# Altium PCB Keyboard.PcbDoc
Units mm, origin at the board's own origin, x right, y up, seen from the top; angles counter-clockwise.
Board outline 290.13 x 100.27 mm, 2 copper layers (Top Layer, Bottom Layer); 133 components, 91 nets, 521 pads, 31 vias.
Unrouted connection lines stored in the file: 15.
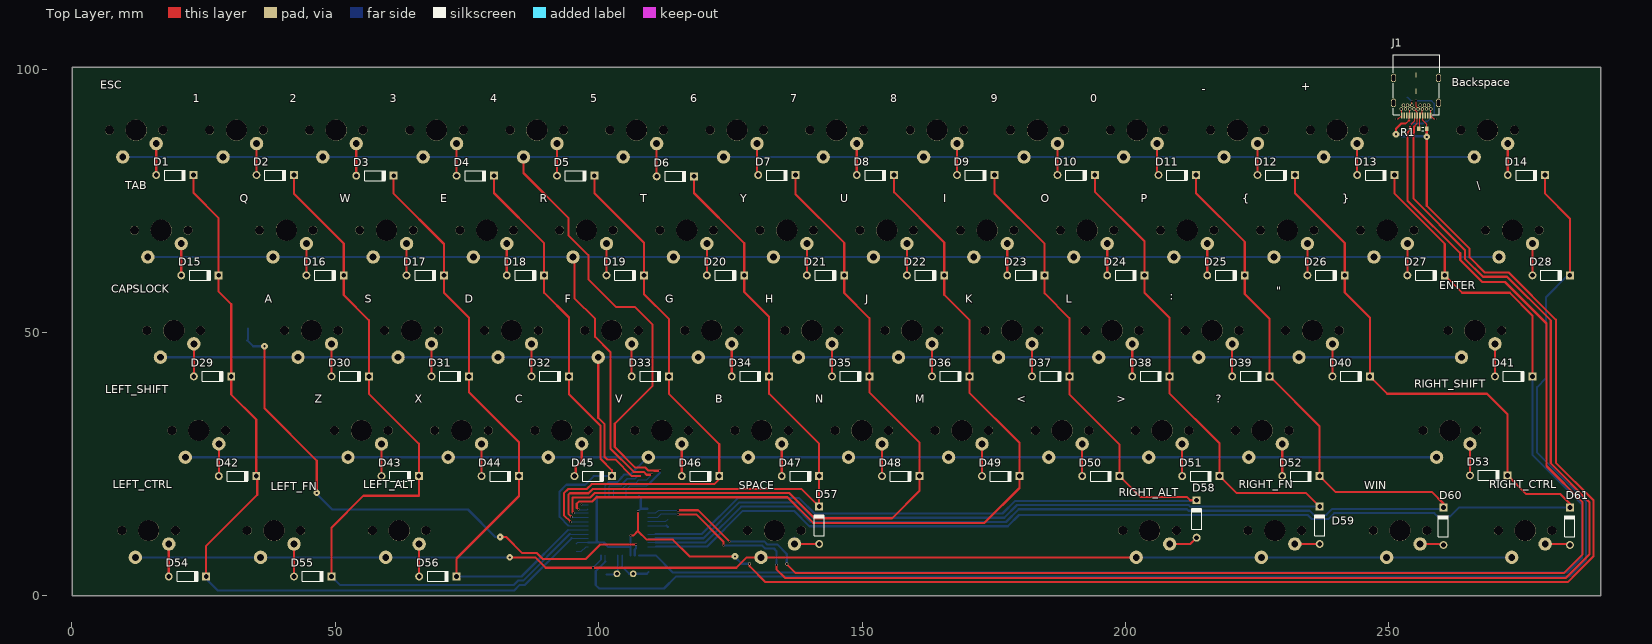
[diagram p0: Top Layer view]
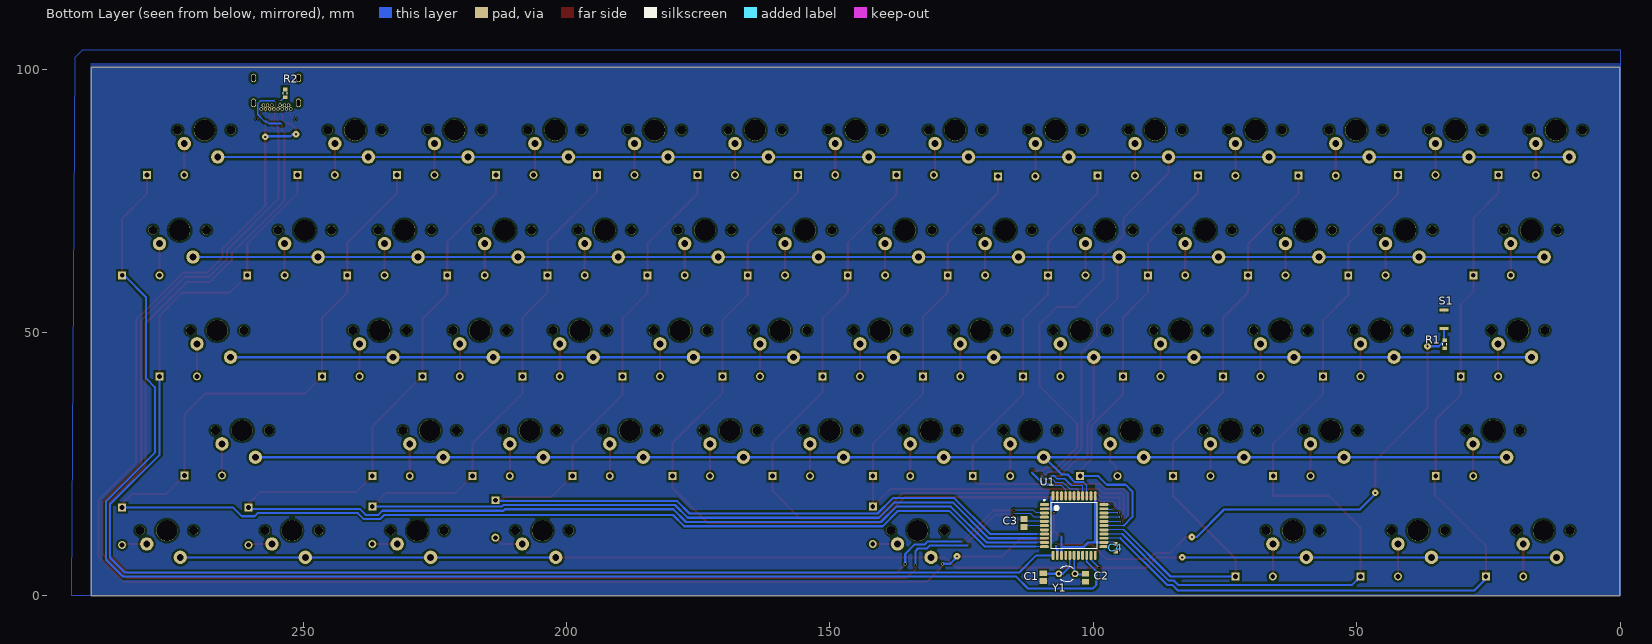
[diagram p1: Bottom Layer view, seen from below]

## Layer stack, top to bottom
Top Solder: solder mask 0.0102, Solder Resist, Dk 3.5
Top Layer: signal copper 0.0356
Dielectric 1: dielectric 0.32, FR-4, Dk 4.8
Bottom Layer: signal copper 0.0356
Bottom Solder: solder mask 0.0102, Solder Resist, Dk 3.5

## Board outline
0.063,0.064 290.195,0.064 290.195,100.33 0.063,100.33

## Design rules (kind name [scope] priority, off if disabled: settings)
Clearance [All] p1: gap=0.4 ignorepadtopadclearanceinfootprint=TRUE except(0: Arc-Hole Track-Hole SMDPad-Hole THPad-Hole Via-Hole Fill-Hole Poly-Hole Region-Hole Text-Hole; 0.1: Arc-SMDPad Arc-THPad Track-SMDPad Track-THPad SMDPad-SMDPad SMDPad-THPad THPad-THPad)
PolygonConnect [All] p1: connectstyle=Relief reliefconductorwidth=0.254 reliefentries=4 polygonreliefangle="90 Angle" airgapwidth=0.254
RoomDefinition Keyboard [InComponentClass('Keyboard')] p1: confinementstyle=ConfineIn formatcopy=TRUE lockcomponents=FALSE outline 0,0 50.8,0 50.8,25.4 0,25.4
RoutingVias [All] p1: holewidth=0.711 width=1.27 viastyle="Through Hole" minholewidth=0.711 minwidth=1.27 maxholewidth=0.711 maxwidth=1.27
SMDNeckDown [All] p1: percent=50.000
SolderMaskExpansion [All] p1: expansion=0.102
Width [All] p1: maxlimit=0.4 minlimit=0.1 preferedwidth=0.4 minimp=50.000000 maximp=50.000000 favimp=50.000000
30 further rules are at their usual default settings.

## Components (designator, comment, footprint, x,y, rotation, side; value= is the part's Value field where it differs from the comment)
0 "KEYSWITCH-PLAIN-MX-1U" MX-1U 202.184,88.392 r180 top
1 "KEYSWITCH-PLAIN-MX-1U" MX-1U 31.242,88.392 r180 top
2 "KEYSWITCH-PLAIN-MX-1U" MX-1U 50.165,88.392 r180 top
3 "KEYSWITCH-PLAIN-MX-1U" MX-1U 69.215,88.392 r180 top
4 "KEYSWITCH-PLAIN-MX-1U" MX-1U 88.265,88.392 r180 top
5 "KEYSWITCH-PLAIN-MX-1U" MX-1U 107.188,88.392 r180 top
6 "KEYSWITCH-PLAIN-MX-1U" MX-1U 126.238,88.392 r180 top
7 "KEYSWITCH-PLAIN-MX-1U" MX-1U 145.161,88.392 r180 top
8 "KEYSWITCH-PLAIN-MX-1U" MX-1U 164.211,88.392 r180 top
9 "KEYSWITCH-PLAIN-MX-1U" MX-1U 183.261,88.392 r180 top
"\"" "KEYSWITCH-PLAIN-MX-1U" MX-1U 235.458,50.379 r180 top
+ "KEYSWITCH-PLAIN-MX-1U" MX-1U 240.157,88.392 r180 top
- "KEYSWITCH-PLAIN-MX-1U" MX-1U 221.234,88.392 r180 top
: "KEYSWITCH-PLAIN-MX-1U" MX-1U 216.435,50.379 r180 top
< "KEYSWITCH-PLAIN-MX-1U" MX-1U 187.96,31.389 r180 top
> "KEYSWITCH-PLAIN-MX-1U" MX-1U 206.94,31.389 r180 top
? "KEYSWITCH-PLAIN-MX-1U" MX-1U 225.933,31.389 r180 top
\ "KEYSWITCH-PLAIN-MX-1U" MX-1U 273.431,69.402 r180 top
A "KEYSWITCH-PLAIN-MX-1U" MX-1U 45.466,50.379 r180 top
B "KEYSWITCH-PLAIN-MX-1U" MX-1U 130.937,31.389 r180 top
Backspace "KEYSWITCH-PLAIN-MX-1U" MX-1U 268.732,88.392 r180 top
C "KEYSWITCH-PLAIN-MX-1U" MX-1U 92.97,31.389 r180 top
C1 "Cap Pol3" C0805 109.474,3.556 r270 bottom value=22pF
C2 "Cap Pol3" C0805 101.473,3.429 r270 bottom value=22pF
C3 "Cap Pol3" C0805 113.157,13.831 r90 bottom value=1uF
C4 "Cap" 1608[0603] 95.758,9.144 r90 bottom value=100nF
CAPSLOCK "KEYSWITCH-PLAIN-MX-1U" MX-1U 19.344,50.379 r180 top
D "KEYSWITCH-PLAIN-MX-1U" MX-1U 83.439,50.379 r180 top
D1 "Diode 1N4148" DO-35 19.552,79.883 r0 top
D2 "Diode 1N4148" DO-35 38.602,79.883 r0 top
D3 "Diode 1N4148" DO-35 57.525,79.756 r0 top
D4 "Diode 1N4148" DO-35 76.575,79.756 r0 top
D5 "Diode 1N4148" DO-35 95.625,79.756 r0 top
D6 "Diode 1N4148" DO-35 114.548,79.629 r0 top
D7 "Diode 1N4148" DO-35 133.813,79.883 r0 top
D8 "Diode 1N4148" DO-35 152.521,79.883 r0 top
D9 "Diode 1N4148" DO-35 171.571,79.883 r0 top
D10 "Diode 1N4148" DO-35 190.621,79.883 r0 top
D11 "Diode 1N4148" DO-35 209.804,79.883 r0 top
D12 "Diode 1N4148" DO-35 228.594,79.883 r0 top
D13 "Diode 1N4148" DO-35 247.517,79.883 r0 top
D14 "Diode 1N4148" DO-35 276.092,79.883 r0 top
D15 "Diode 1N4148" DO-35 24.311,60.833 r0 top
D16 "Diode 1N4148" DO-35 48.06,60.833 r0 top
D17 "Diode 1N4148" DO-35 67.077,60.833 r0 top
D18 "Diode 1N4148" DO-35 86.1,60.833 r0 top
D19 "Diode 1N4148" DO-35 105.023,60.833 r0 top
D20 "Diode 1N4148" DO-35 124.073,60.833 r0 top
D21 "Diode 1N4148" DO-35 143.06,60.833 r0 top
D22 "Diode 1N4148" DO-35 162.046,60.833 r0 top
D23 "Diode 1N4148" DO-35 181.096,60.833 r0 top
D24 "Diode 1N4148" DO-35 200.069,60.833 r0 top
D25 "Diode 1N4148" DO-35 219.069,60.833 r0 top
D26 "Diode 1N4148" DO-35 238.069,60.833 r0 top
D27 "Diode 1N4148" DO-35 257.042,60.833 r0 top
D28 "Diode 1N4148" DO-35 280.791,60.833 r0 top
D29 "Diode 1N4148" DO-35 26.704,41.656 r0 top
D30 "Diode 1N4148" DO-35 52.826,41.656 r0 top
D31 "Diode 1N4148" DO-35 71.816,41.656 r0 top
D32 "Diode 1N4148" DO-35 90.799,41.656 r0 top
D33 "Diode 1N4148" DO-35 109.809,41.656 r0 top
D34 "Diode 1N4148" DO-35 128.799,41.656 r0 top
D35 "Diode 1N4148" DO-35 147.822,41.656 r0 top
D36 "Diode 1N4148" DO-35 166.812,41.656 r0 top
D37 "Diode 1N4148" DO-35 185.795,41.656 r0 top
D38 "Diode 1N4148" DO-35 204.815,41.656 r0 top
D39 "Diode 1N4148" DO-35 223.795,41.656 r0 top
D40 "Diode 1N4148" DO-35 242.818,41.656 r0 top
D41 "Diode 1N4148" DO-35 273.679,41.656 r0 top
D42 "Diode 1N4148" DO-35 31.44,22.733 r0 top
D43 "Diode 1N4148" DO-35 62.311,22.733 r0 top
D44 "Diode 1N4148" DO-35 81.314,22.733 r0 top
D45 "Diode 1N4148" DO-35 98.939,22.733 r0 top
D46 "Diode 1N4148" DO-35 119.32,22.733 r0 top
D47 "Diode 1N4148" DO-35 138.297,22.733 r0 top
D48 "Diode 1N4148" DO-35 157.317,22.733 r0 top
D49 "Diode 1N4148" DO-35 176.31,22.733 r0 top
D50 "Diode 1N4148" DO-35 195.32,22.733 r0 top
D51 "Diode 1N4148" DO-35 214.3,22.733 r0 top
D52 "Diode 1N4148" DO-35 233.293,22.733 r0 top
D53 "Diode 1N4148" DO-35 268.94,22.86 r0 top
D54 "Diode 1N4148" DO-35 21.94,3.683 r0 top
D55 "Diode 1N4148" DO-35 45.714,3.683 r0 top
D56 "Diode 1N4148" DO-35 69.463,3.683 r0 top
D57 "Diode 1N4148" DO-35 141.847,13.396 r90 top
D58 "Diode 1N4148" DO-35 213.487,14.599 r90 top
D59 "Diode 1N4148" DO-35 236.843,13.396 r90 top
D60 "Diode 1N4148" DO-35 260.35,13.208 r90 top
D61 "Diode 1N4148" DO-35 284.353,13.208 r90 top
E "KEYSWITCH-PLAIN-MX-1U" MX-1U 78.74,69.402 r180 top
ENTER "KEYSWITCH-PLAIN-MX-1U" MX-1U 266.319,50.379 r180 top
ESC "KEYSWITCH-PLAIN-MX-1U" MX-1U 12.192,88.392 r180 top
F "KEYSWITCH-PLAIN-MX-1U" MX-1U 102.449,50.379 r180 top
G "KEYSWITCH-PLAIN-MX-1U" MX-1U 121.439,50.379 r180 top
H "KEYSWITCH-PLAIN-MX-1U" MX-1U 140.462,50.379 r180 top
I "KEYSWITCH-PLAIN-MX-1U" MX-1U 173.736,69.402 r180 top
J "KEYSWITCH-PLAIN-MX-1U" MX-1U 159.452,50.379 r180 top
J1 "USB 3.1 Type C" 632723100011 255.143,96.813 r180 top
K "KEYSWITCH-PLAIN-MX-1U" MX-1U 178.435,50.379 r180 top
L "KEYSWITCH-PLAIN-MX-1U" MX-1U 197.455,50.379 r180 top
LEFT_ALT "KEYSWITCH-PLAIN-MX-1U" MX-1U 62.103,12.386 r180 top
LEFT_CTRL "KEYSWITCH-PLAIN-MX-1U" MX-1U 14.58,12.386 r180 top
LEFT_FN "KEYSWITCH-PLAIN-MX-1U" MX-1U 38.354,12.386 r180 top
LEFT_SHIFT "KEYSWITCH-PLAIN-MX-1U" MX-1U 24.08,31.389 r180 top
M "KEYSWITCH-PLAIN-MX-1U" MX-1U 168.95,31.389 r180 top
N "KEYSWITCH-PLAIN-MX-1U" MX-1U 149.957,31.389 r180 top
O "KEYSWITCH-PLAIN-MX-1U" MX-1U 192.709,69.402 r180 top
P "KEYSWITCH-PLAIN-MX-1U" MX-1U 211.709,69.402 r180 top
Q "KEYSWITCH-PLAIN-MX-1U" MX-1U 40.7,69.402 r180 top
R "KEYSWITCH-PLAIN-MX-1U" MX-1U 97.663,69.402 r180 top
R1 "Res3" J1-0603 256.425,88.646 r180 top value=5K1
R1 "Res3" J1-0603 33.274,47.752 r270 bottom value=10K
R2 "Res3" J1-0603 253.365,95.377 r90 bottom value=5K1
RIGHT_ALT "KEYSWITCH-PLAIN-MX-1U" MX-1U 204.57,12.386 r180 top
RIGHT_CTRL "KEYSWITCH-PLAIN-MX-1U" MX-1U 275.844,12.386 r180 top
RIGHT_FN "KEYSWITCH-PLAIN-MX-1U" MX-1U 228.319,12.386 r180 top
RIGHT_SHIFT "KEYSWITCH-PLAIN-MX-1U" MX-1U 261.58,31.389 r180 top
S "KEYSWITCH-PLAIN-MX-1U" MX-1U 64.456,50.379 r180 top
S1 "SPST.B3U-1000P(M)" B3U-1000P(M) 33.401,52.479 r90 bottom
SPACE "KEYSWITCH-PLAIN-MX-1U" MX-1U 133.34,12.386 r180 top
T "KEYSWITCH-PLAIN-MX-1U" MX-1U 116.713,69.402 r180 top
TAB "KEYSWITCH-PLAIN-MX-1U" MX-1U 16.951,69.402 r180 top
U "KEYSWITCH-PLAIN-MX-1U" MX-1U 154.686,69.402 r180 top
U1 "ATmega32U4-AU" 44ML_N 103.632,13.335 r180 bottom
V "KEYSWITCH-PLAIN-MX-1U" MX-1U 111.96,31.389 r180 top
W "KEYSWITCH-PLAIN-MX-1U" MX-1U 59.717,69.402 r180 top
WIN "KEYSWITCH-PLAIN-MX-1U" MX-1U 252.1,12.386 r180 top
X "KEYSWITCH-PLAIN-MX-1U" MX-1U 73.954,31.389 r180 top
Y "KEYSWITCH-PLAIN-MX-1U" MX-1U 135.7,69.402 r180 top
Y1 "XTAL" R38 105.003,4.191 r270 bottom
Z "KEYSWITCH-PLAIN-MX-1U" MX-1U 54.951,31.389 r180 top
{ "KEYSWITCH-PLAIN-MX-1U" MX-1U 230.709,69.402 r180 top
} "KEYSWITCH-PLAIN-MX-1U" MX-1U 249.682,69.402 r180 top

## Footprints (in the part's own frame and the unit in brackets; to place one, negate y for a bottom-side part, rotate by r counter-clockwise, add the part's x,y. Pads: shape width x height; smd on the part's side, far side on the other; paste and mask are expansions set on the pad)
44ML_N [mm] "Thin QFP, 44-Leads, Body 10x10mm, Pitch 0.8mm, IPC Medium Density"
  oval 1.75x0.55 smd: 1(-5.65,4) 2(-5.65,3.2) 3(-5.65,2.4) 4(-5.65,1.6) 5(-5.65,0.8) 6(-5.65,0) 7(-5.65,-0.8) 8(-5.65,-1.6) 9(-5.65,-2.4) 10(-5.65,-3.2) 11(-5.65,-4) 23(5.65,-4) 24(5.65,-3.2) 25(5.65,-2.4) 26(5.65,-1.6) 27(5.65,-0.8) 28(5.65,0) 29(5.65,0.8) 30(5.65,1.6) 31(5.65,2.4) 32(5.65,3.2) 33(5.65,4)
  oval 0.55x1.75 smd: 12(-4,-5.65) 13(-3.2,-5.65) 14(-2.4,-5.65) 15(-1.6,-5.65) 16(-0.8,-5.65) 17(0,-5.65) 18(0.8,-5.65) 19(1.6,-5.65) 20(2.4,-5.65) 21(3.2,-5.65) 22(4,-5.65) 34(4,5.65) 35(3.2,5.65) 36(2.4,5.65) 37(1.6,5.65) 38(0.8,5.65) 39(0,5.65) 40(-0.8,5.65) 41(-1.6,5.65) 42(-2.4,5.65) 43(-3.2,5.65) 44(-4,5.65)
  silkscreen extent -5.77,-4.35 4.35,4.95, body extent -5,-5 5,5, height 1.2
1608[0603] [mm] "Chip Capacitor, Body 1.6x0.8mm, IPC High Density"
  rect 0.8x0.9 smd: 1(-0.7,0) 2(0.7,0)
  body extent -0.87,-0.48 0.87,0.48, height 1.3
632723100011 [mm] "USB 3.1 Type C Receptacle Horizontal THR"
  rect 0.3x1.2 smd: A1(-2.75,5.635) A2(-2.25,5.635) A3(-1.75,5.635) A4(-1.25,5.635) A5(-0.75,5.635) A6(-0.25,5.635) A7(0.25,5.635) A8(0.75,5.635) A9(1.25,5.635) A10(1.75,5.635) A11(2.25,5.635) A12(2.75,5.635)
  round 0.65 hole 0.4: B1(2.8,4.385) B2(2.4,3.685) B3(1.6,3.685) B4(1.2,4.385) B5(0.8,3.685) B6(0.4,4.385) B7(-0.4,4.385) B8(-0.8,3.685) B9(-1.2,4.385) B10(-1.6,3.685) B11(-2.4,3.685) B12(-2.8,4.385) G1(2,4.385) G2(-2,4.385)
  oval 1x1.6 hole 0.6 slot 1.2 at 90 deg: S1(-4.27,3.235) S2(4.27,3.235) S3(-4.27,-1.495) S4(4.27,-1.495)
  rect 0.2x1 smd: ""(0,1.055) ""(0,-2.045)
  silkscreen extent -4.37,-5.89 4.37,5.47, body extent -4.37,-5.89 4.37,5.9, height 3.05
B3U-1000P(M) [mm]
  rect 0.6x1.7 smd mask+0: 1(-1.75,0) 2(1.75,0)
C0805 [mm] "Chip Capacitor, Body 2.0x1.3mm, IPC High Density"
  rect 1.1x1.4 smd: 1(-0.75,0) 2(0.75,0)
  body extent -1.1,-0.72 1.1,0.72, height 1.4
DO-35 [mm] "Diode, Axial; Body 3.8 x 1.9 mm (LxDia. max), Lead Dia. 0.53 mm (max)"
  round 1.5 hole 0.9: 1(-3.55,0)
  rect 1.5x1.5 hole 0.9: 2(3.55,0)
  silkscreen extent -1.95,-0.95 2.05,0.95
J1-0603 [mm] "Chip Resistor, Body 1.6x0.8mm, IPC High Density"
  rect 0.7x0.9 smd: 1(-0.75,0) 2(0.75,0)
  silkscreen extent -0.2,-0.35 0.2,0.35, body extent -0.85,-0.48 0.85,0.48, height 0.9
MX-1U [mm]
  round 1.7 hole 1.7 unplated: 1(-5.08,0) 1(5.08,0)
  round 4 hole 4 unplated: 1(0,0)
  round 2.54 / inner round 1.524 / far side round 2.54 hole 1.3: MX1(-3.81,2.54) MX2(2.54,5.08)
R38 [mm] "Crystal, Thru-Hole; 2 Leads; Body 3.1 x 8.2 mm (Dia.xH)"
  round 1.3 hole 0.7: 1(0,1.55) 2(0,-1.55)
  silkscreen extent -1.55,-1.19 1.55,1.17

## Part data
0 1 2 3 4 5 6 7 8 9 "\"" + - : < > ? \ A B Backspace C CAPSLOCK D E ENTER ESC F G H I J K L LEFT_ALT LEFT_CTRL LEFT_FN LEFT_SHIFT M N O P Q R RIGHT_ALT RIGHT_CTRL RIGHT_FN RIGHT_SHIFT S SPACE T TAB U V W WIN X Y Z { }: Package=MX-1U, DeviceName=-MX-1U, DeviceSetName=KEYSWITCH-PLAIN, GateName_1=G$1, LibraryName=Keyboard, SymbolName_1=KEYSWITCH-PLAIN
C1 C2 C3: "Polarized Capacitor (Surface Mount)", LatestRevisionDate=29-May-2009, LatestRevisionNote="IPC-7351 Footprint Added.", PackageDescription="Chip Capacitor", PackageReference=C0805, Published=8-Jun-2000, Publisher="Altium Limited"
C4: "Capacitor", LatestRevisionDate=17-Jul-2002, LatestRevisionNote="Re-released for DXP Platform.", PackageDescription="Radial Cap, Thru-Hole; 2 Leads; 0.3 in Pin Spacing", PackageReference=RAD-0.3, Published=8-Jun-2000, Publisher="Altium Limited"
D1 D2 D3 D4 D5 D6 D7 D8 D9 D10 D11 D12 D13 D14 D15 D16 D17 D18 D19 D20 D21 D22 D23 D24 D25 D26 D27 D28 D29 D30 D31 D32 D33 D34 D35 D36 D37 D38 D39 D40 D41 D42 D43 D44 D45 D46 D47 D48 D49 D50 D51 D52 D53 D54 D55 D56 D57 D58 D59 D60 D61: "High Conductance Fast Diode", Code_JEDEC=DO-204-AH, ComponentLink1Description="Manufacturer Link", ComponentLink1URL=http://www.fairchildsemi.com/, ComponentLink2Description=Datasheet, ComponentLink2URL=http://www.fairchildsemi.com/ds/1N%2F1N4148.pdf, DatasheetVersion=1997, LatestRevisionDate=17-Jul-2002, LatestRevisionNote="Re-released for DXP Platform.", PackageDescription="Diode, Axial; Body 3.8 x 1.9 mm (LxDia. max), Lead Dia. 0.53 mm (max)", PackageReference=DO-35, Published=8-Jun-2000, Publisher="Altium Limited"
J1: library part 632723100011, "USB 3.1 Type C Receptacle Horizontal THR WR-COM", Operating Temperature="-25 to 105 degC", Rated Current="5 A", ComponentLink1Description=Manufacturer, ComponentLink1URL=http://www.we-online.de, ComponentLink2Description=Datasheet, ComponentLink2URL=http://katalog.we-online.de/em/datasheet/632723x00011.pdf, Gender="Female Plug", Interface Type="USB 3.1 Type C", Mounting Technology=THR, Orientation=Horizontal, Packaging="Tape and Reel with Cap", Part Number=632723100011, Published Date="May 2018", Publisher="Wurth Elektronik"
R1 R1 R2: "Resistor", LatestRevisionDate=29-May-2009, LatestRevisionNote="IPC-7351 Footprint Added.", PackageDescription="Chip Resistor", PackageReference=J1-0603, Published=8-Jun-2000, Publisher="Altium Limited"
S1: Package=B3U-1000P(M), DeviceName=.B3U-1000P(M), DeviceSetName=SPST, GateName_1=G$1, LibraryName=omran_switches, SymbolName_1=SPST
U1: "8-bit AVR Microcontroller, 2.7-5.5V, 16MHz, 32KB Flash, 1KB EEPROM, 2.5KB SRAM, USB Controller, 44-pin TQFP, Industrial Grade (-40°C to 85°C), Ext Osc", ComponentLink1Description="Manufacturer URL", ComponentLink1URL=http://www.atmel.com/, ComponentLink2Description="ATmega16U4/32U4 Datasheet", ComponentLink2URL=http://www.atmel.com/dyn/resources/prod_documents/doc7766.pdf, ComponentLink3Description="ATmega16U4 ATmega32U4 Summary", ComponentLink3URL=http://www.atmel.com/dyn/resources/prod_documents/7766S.pdf, DatasheetVersion="revF, Nov-2010", PackageDescription="44-Pin Plastic Thin Quad Flat Pack, 10 x 10 x 1.0 mm Body, 0.8 mm Pitch (TQFP)", PackageReference=44ML, PackageVersion="rev.G, Jul-2007"
Y1: "Crystal Oscillator", LatestRevisionDate=17-Jul-2002, LatestRevisionNote="Re-released for DXP Platform.", PackageDescription="Crystal, Thru-Hole; 2 Leads; Body 3.1 x 8.2 mm (Dia.xH)", PackageReference=R38, Published=8-Jun-2000, Publisher="Altium Limited"

## Via types
v1: diameter 0.4, hole 0.4, Top Layer to Bottom Layer, 22 vias
v2: diameter 1.27, hole 0.4, Top Layer to Bottom Layer, 7 vias
v3: diameter 0.6, hole 0.4, Top Layer to Bottom Layer, 2 vias

## Nets (pads, with @x,y where several pads share a name; then routed paths per layer and width w, separated by ;. In a path a pad name is that pad's centre, name@x,y a point inside that pad or via, vN(x,y) a via of type N, cw(c..) or ccw(c..) an arc to the next point about the centre after c; other vN are vias at no path point)
+5: C4.2 J1.A4 J1.A9 J1.B4 J1.B9 R1.1@257.175,88.646 R1.2@33.274,47.002 R2.2 U1.2 U1.7 U1.14 U1.24 U1.34 U1.44 | length 334.9
  Top Layer w0.1: 253.893,90.19 J1.A9 253.918,91.178 253.918,92.403 J1.B4 ; J1.B9@256.368,92.403 J1.B9 256.343,91.435 256.393,91.385 J1.A4 256.393,90.317 257.175,89.535 257.175,88.912 R1.1@257.042,88.779
  Top Layer w0.3: 252.857,89.662 253.193,89.662 253.689,90.158 253.861,90.158 253.893,90.19
  Top Layer w0.4: v1(106.045,11.43) 106.553,11.43 107.442,12.319 ; v1(107.442,16.002) 107.442,12.319 ; v2(125.857,7.493) 117.221,7.493 114.046,10.668 109.093,10.668 107.442,12.319 ; v3(128.651,6.096) 128.651,5.588 131.645,2.594 283.924,2.594 285.572,4.242 288.836,7.506 288.836,18.148 281.686,25.298 281.686,52.439 272.746,61.379 268.174,61.379 265.303,64.25 265.303,65.913 257.175,74.041 v2(257.175,87.122) R1.1@257.175,88.646 ; v2(251.333,87.63) 251.333,88.646 252.349,89.662 252.857,89.662
  Bottom Layer w0.1: C4.2 C4.2@96.049,10.135
  Bottom Layer w0.2: C4.2@96.049,10.135 U1.24
  Bottom Layer w0.4: U1.24 99.949,10.135 ; U1.34 99.632,10.452 99.949,10.135 ; U1.14 106.032,9.258 ; v1(106.045,11.43) 106.045,9.271 106.032,9.258 ; v1(107.442,16.002) 107.975,16.535 ; U1.44 107.975,18.642 107.975,16.535 ; U1.2 107.975,16.535 ; v2@125.857,7.366 127.127,6.096 v3(128.651,6.096) ; v2(251.333,87.63) 251.968,87.63 252.349,87.249 v2@257.302,87.249 ; 99.949,10.135 100.99,10.135 101.867,9.258 106.032,9.258
GND: C1.2 C2.2 C3.2 C4.1 J1.A1 J1.A12 J1.B1 J1.B12 J1.G1 J1.G2 S1.2 U1.5 U1.15 U1.23 U1.33 U1.35 U1.43 | length 12.9
  Top Layer w0.1: v1(251.46,90.551) 251.766,90.551 J1.A12 252.393,92.378 J1.B1 ; J1.B12 257.893,92.378 J1.A1 258.52,90.551 v1(258.826,90.551)
  Bottom Layer w0.1: U1.23@97.6,9.335 U1.23 ; C3.2@112.711,14.135 C3.2
  Bottom Layer w0.2: C4.1 96.709,8.444 U1.23@97.6,9.335 ; v1(96.71,17.335) U1.33 ; U1.5 C3.2@112.711,14.135
Net0_MX1: 0.MX1 D11.1 | length 6.1
  Top Layer w0.4: 0.MX1 205.994,80.143 D11.1
Net1_MX1: 1.MX1 D2.1 | length 6
  Top Layer w0.4: D2.1 1.MX1
Net2_MX1: 2.MX1 D3.1 | length 6.1
  Top Layer w0.4: D3.1 2.MX1
Net3_MX1: 3.MX1 D4.1 | length 6.1
  Top Layer w0.4: D4.1 3.MX1
Net4_MX1: 4.MX1 D5.1 | length 6.1
  Top Layer w0.4: D5.1 4.MX1
Net5_MX1: 5.MX1 D6.1 | length 6.2
  Top Layer w0.4: D6.1 5.MX1
Net6_MX1: 6.MX1 D7.1 | length 6.1
  Top Layer w0.4: 6.MX1 130.048,80.098 D7.1
Net7_MX1: 7.MX1 D8.1 | length 6
  Top Layer w0.4: D8.1 7.MX1
Net8_MX1: 8.MX1 D9.1 | length 6
  Top Layer w0.4: D9.1 8.MX1
Net9_MX1: 9.MX1 D10.1 | length 6
  Top Layer w0.4: D10.1 9.MX1
"Net\"_MX1": "\".MX1" D40.1 | length 6.2
  Top Layer w0.4: D40.1 239.268,47.839
"Net\"_MX2": "\".MX2" :.MX2 A.MX2 CAPSLOCK.MX2 D.MX2 ENTER.MX2 F.MX2 G.MX2 H.MX2 J.MX2 K.MX2 L.MX2 S.MX2 U1.37 | length 283.7
  Top Layer w0.4: F.MX2 99.909,33.81 101.13,32.589 101.13,26.366 101.577,25.92 103.112,25.92 106.299,22.733 v1(108.204,22.733)
  Bottom Layer w0.2: U1.37 102.032,20.849 102.073,20.89 104.242,20.89
  Bottom Layer w0.3: 104.267,21.082 105.41,22.225 106.908,22.225 107.416,22.733
  Bottom Layer w0.4: CAPSLOCK.MX2 A.MX2 S.MX2 D.MX2 F.MX2 G.MX2 H.MX2 J.MX2 K.MX2 L.MX2 :.MX2 232.918,45.299 ENTER.MX2 ; 107.416,22.733 v1(108.204,22.733)
Net+_MX1: +.MX1 D13.1 | length 6
  Top Layer w0.4: D13.1 +.MX1
Net+_MX2: 0.MX2 1.MX2 2.MX2 3.MX2 4.MX2 5.MX2 6.MX2 7.MX2 8.MX2 9.MX2 +.MX2 -.MX2 Backspace.MX2 ESC.MX2 U1.41 | length 347.7
  Top Layer w0.4: 4.MX2 85.725,80.264 94.234,71.755 94.234,68.453 98.044,64.643 98.044,60.071 103.251,54.864 106.807,54.864 110.236,51.435 110.236,39.878 103.035,32.677 103.035,28.26 106.962,24.333 108.867,24.333 109.413,23.787 110.44,23.787 110.478,23.749 v1(111.633,23.749)
  Bottom Layer w0.2: U1.41 105.232,20.142 105.965,20.875 109.128,20.875 109.462,21.209 109.728,21.475
  Bottom Layer w0.4: ESC.MX2 1.MX2 2.MX2 3.MX2 4.MX2 5.MX2 6.MX2 7.MX2 8.MX2 9.MX2 0.MX2 -.MX2 +.MX2 Backspace.MX2 ; 108.331,21.209 109.462,21.209 ; 109.728,21.475 111.633,23.38 v1(111.633,23.749)
Net-_MX1: -.MX1 D12.1 | length 6
  Top Layer w0.4: D12.1 -.MX1
Net:_MX1: :.MX1 D39.1 | length 6.2
  Top Layer w0.4: D39.1 :.MX1
Net<_MX1: <.MX1 D50.1 | length 6.1
  Top Layer w0.4: D50.1 <.MX1
Net<_MX2: <.MX2 >.MX2 ?.MX2 B.MX2 C.MX2 LEFT_SHIFT.MX2 M.MX2 N.MX2 RIGHT_SHIFT.MX2 U1.36 V.MX2 X.MX2 Z.MX2 | length 249.8
  Bottom Layer w0.2: U1.36 101.232,20.968
  Bottom Layer w0.3: 101.232,20.968 101.854,21.59
  Bottom Layer w0.4: LEFT_SHIFT.MX2 Z.MX2 X.MX2 C.MX2 V.MX2@109.279,26.309 ; 101.854,21.59 103.505,21.59 104.38,22.465 104.38,22.536 104.869,23.025 105.995,23.025 V.MX2@109.279,26.309 ; RIGHT_SHIFT.MX2 ?.MX2 >.MX2 <.MX2 M.MX2 N.MX2 B.MX2 V.MX2 V.MX2@109.279,26.309
Net>_MX1: >.MX1 D51.1 | length 6.1
  Top Layer w0.4: D51.1 >.MX1
Net?_MX1: ?.MX1 D52.1 | length 6.1
  Top Layer w0.4: D52.1 ?.MX1
Net\_MX1: \.MX1 D28.1 | length 6
  Top Layer w0.4: D28.1 \.MX1
Net\_MX2: \.MX2 E.MX2 I.MX2 O.MX2 P.MX2 Q.MX2 R.MX2 T.MX2 TAB.MX2 U1.38 U.MX2 W.MX2 Y.MX2 {.MX2 }.MX2 | length 315.3
  Top Layer w0.4: R.MX2 95.377,64.068 95.377,56.515 99.314,52.578 99.314,49.149 102.235,46.228 102.235,27.928 106.63,23.533 108.535,23.533 109.081,22.987 v1(110.109,22.987)
  Bottom Layer w0.2: U1.38 102.832,20.125 102.897,20.19 104.391,20.19 105.676,21.475 107.077,21.475 107.635,22.033 109.155,22.033 v1(110.109,22.987)
  Bottom Layer w0.4: TAB.MX2 Q.MX2 W.MX2 E.MX2 R.MX2 T.MX2 Y.MX2 U.MX2 I.MX2 O.MX2 P.MX2 {.MX2 }.MX2 \.MX2
NetA_MX1: A.MX1 D30.1 | length 6.2
  Top Layer w0.4: D30.1 A.MX1
NetB_MX1: B.MX1 D47.1 | length 6.1
  Top Layer w0.4: D47.1 B.MX1
NetBackspace_MX1: Backspace.MX1 D14.1 | length 6
  Top Layer w0.4: D14.1 Backspace.MX1
NetC1_1: C1.1 U1.16 Y1.2 | length 7.9
  Bottom Layer w0.3: 104.432,5.55 U1.16
  Bottom Layer w0.4: 104.432,5.55 105.791,4.191 Y1.2 109.117,4.191 C1.1@109.474,4.548
NetC2_1: C2.1 U1.17 Y1.1 | length 5.6
  Bottom Layer w0.3: Y1.1@103.632,4.37 U1.17
  Bottom Layer w0.4: C2.1@101.473,4.052 103.314,4.052 Y1.1 Y1.1@103.632,4.37
NetC3_1: C3.1 U1.6 | length 4
  Bottom Layer w0.2: U1.6 C3.1@112.903,13.335
  Bottom Layer w0.4: C3.1@112.903,13.335 C3.1
NetC_MX1: C.MX1 D45.1 | length 6.7
  Top Layer w0.4: D45.1 95.631,22.975 95.631,24.384 96.78,25.533 C.MX1
NetCAPSLOCK_MX1: CAPSLOCK.MX1 D29.1 | length 6.2
  Top Layer w0.4: D29.1 CAPSLOCK.MX1
NetD1_1: D1.1 ESC.MX1 | length 6
  Top Layer w0.4: D1.1 ESC.MX1
NetD1_2: D1.2 D15.2 D29.2 D42.2 D54.2 U1.25 | length 163.2
  Top Layer w0.4: D1.2 23.102,76.466 27.861,71.707 D15.2 27.861,57.737 30.254,55.344 D29.2 30.254,38.199 34.99,33.463 D42.2 35.179,22.544 35.179,19.177 25.49,9.488 D54.2
  Bottom Layer w0.2: 94.859,10.935 U1.25
  Bottom Layer w0.4: D54.2 25.49,3.212 27.686,1.016 83.935,1.016 85.002,2.083 86.007,2.083 94.859,10.935
NetD2_2: D2.2 D16.2 D30.2 D43.2 D55.2 U1.26 | length 152.5
  Top Layer w0.4: D2.2 42.152,76.339 51.61,66.881 D16.2 51.61,57.102 56.376,52.336 D30.2 56.376,38.366 65.861,28.881 D43.2 65.861,18.998 55.32,18.998 49.264,12.942 D55.2
  Bottom Layer w0.2: 94.527,11.735 U1.26
  Bottom Layer w0.4: D55.2 50.915,2.032 83.82,2.032 84.671,2.883 85.675,2.883 94.527,11.735
NetD3_2: D3.2 D17.2 D31.2 D44.2 D56.2 U1.27 | length 119.5
  Top Layer w0.4: D3.2 61.075,76.339 70.627,66.787 D17.2 70.627,57.516 75.366,52.777 D31.2 75.366,38.68 84.864,29.182 D44.2 84.864,18.951 73.013,7.1 D56.2
  Bottom Layer w0.2: 94.196,12.535 U1.27
  Bottom Layer w0.4: D56.2 85.344,3.683 94.196,12.535
NetD4_2: D4.2 D18.2 D32.2 D45.2 U1.28 | length 88.3
  Top Layer w0.4: D4.2 80.125,76.466 89.65,66.941 D18.2 89.65,57.543 94.349,52.844 D32.2 94.349,38.239 100.33,32.258 100.33,26.035 102.489,23.876 D45.2
  Bottom Layer w0.2: 94.234,13.335 U1.28
  Bottom Layer w0.4: 94.234,13.335 92.583,14.986 92.583,19.812 93.853,21.082 97.409,21.082 99.06,22.733 D45.2
NetD5_2: D5.2 D19.2 D33.2 D46.2 U1.29 | length 107.3
  Top Layer w0.4: v1(94.665,14.035) 93.383,15.317 93.383,19.481 94.184,20.282 97.74,20.282 98.667,21.209 121.92,21.209 D46.2@122.87,22.159 ; D5.2 99.175,76.466 108.573,67.068 D19.2 108.573,57.289 113.359,52.503 D33.2 113.359,38.279 122.87,28.768 D46.2
  Bottom Layer w0.2: v1(94.665,14.035) U1.29@97.982,14.035
  Bottom Layer w0.4: D46.2@122.87,22.159 D46.2
NetD6_2: D6.2 D20.2 D34.2 D47.2 D57.2 U1.30 | length 129.6
  Top Layer w0.4: v1(94.846,14.986) 94.234,15.598 94.234,19.2 94.516,19.482 98.072,19.482 98.91,20.32 138.473,20.32 D57.2 D47.2 141.847,28.841 132.349,38.339 D34.2 132.349,52.944 127.623,57.67 D20.2 127.623,66.941 118.098,76.466 D6.2
  Bottom Layer w0.2: v1@94.897,14.935 U1.30
  Bottom Layer w0.4: v1(94.846,14.986) v1@94.897,14.935
NetD7_2: D7.2 D21.2 D35.2 D48.2 U1.31 | length 145.8
  Top Layer w0.4: v1(95.233,15.731) 95.034,15.929 95.034,18.593 95.123,18.682 98.403,18.682 99.241,19.52 136.182,19.52 140.97,14.732 155.702,14.732 160.867,19.897 D48.2 160.867,29.125 151.372,38.62 D35.2 151.372,52.717 146.61,57.479 D21.2 146.61,67.004 137.363,76.251 D7.2
  Bottom Layer w0.2: v1@95.237,15.735 U1.31
  Bottom Layer w0.4: v1(95.233,15.731) v1@95.237,15.735
NetD8_2: D8.2 D22.2 D36.2 D49.2 U1.32 | length 161.7
  Top Layer w0.4: v1(96.18,16.383) 95.834,16.729 95.834,17.475 96.241,17.882 98.734,17.882 99.572,18.72 135.839,18.72 140.716,13.843 173.228,13.843 179.86,20.475 D49.2 179.86,29.055 170.362,38.553 D36.2 170.362,52.396 165.596,57.162 D22.2 165.596,67.068 156.071,76.593 D8.2
  Bottom Layer w0.2: v1(96.18,16.383) 97.83,16.383 U1.32
NetD9_2: D9.2 D23.2 D37.2 D50.2 D58.2 U1.8 | length 192.1
  Top Layer w0.4: D9.2 175.121,76.339 184.646,66.814 D23.2 184.646,57.416 189.345,52.717 D37.2 189.345,38.239 198.87,28.714 D50.2 202.807,18.796 211.637,18.796 212.284,18.149 D58.2
  Bottom Layer w0.2: U1.8 110.835,11.735
  Bottom Layer w0.4: 110.835,11.735 119.558,11.735 126.365,18.542 138.049,18.542 140.97,15.621 176.657,15.621 179.07,18.034 D58.2@212.852,18.034
NetD10_2: D10.2 D24.2 D38.2 D51.2 D59.2 U1.9 | length 221.1
  Top Layer w0.4: D10.2 194.171,76.72 203.619,67.272 D24.2 203.619,57.493 208.365,52.747 D38.2 208.365,38.396 217.85,28.911 D51.2 221.025,19.558 234.231,19.558 D59.2
  Bottom Layer w0.2: U1.9 110.835,10.935
  Bottom Layer w0.4: 110.835,10.935 119.889,10.935 126.696,17.742 137.718,17.742 140.639,14.821 176.988,14.821 179.401,17.234 211.989,17.234 212.277,16.946 D59.2
NetD11_2: D11.2 D25.2 D39.2 D52.2 D60.2 U1.10 | length 250.8
  Top Layer w0.4: D11.2 213.354,76.46 222.619,67.195 D25.2 222.619,57.289 227.345,52.563 D39.2 236.843,32.158 D52.2 239.891,19.685 258.191,19.685 260.35,17.526 D60.2@260.35,16.383
  Bottom Layer w0.2: U1.10 110.835,10.135
  Bottom Layer w0.4: 110.835,10.135 120.221,10.135 127.028,16.942 137.386,16.942 140.307,14.021 177.32,14.021 179.733,16.434 211.658,16.434 211.946,16.146 234.933,16.146 235.712,15.367 238.125,15.367 239.268,16.51 260.102,16.51 D60.2
NetD12_2: D12.2 D26.2 D40.2 D53.2 D61.2 U1.11 | length 281.4
  Top Layer w0.4: D12.2 232.144,76.466 241.619,66.991 D26.2 241.619,57.593 246.368,52.844 D40.2 249.67,38.354 268.605,38.354 272.49,34.469 D53.2 276.046,19.304 282.575,19.304 284.353,17.526 D61.2
  Bottom Layer w0.2: U1.11 110.871,9.335
  Bottom Layer w0.4: 110.871,9.335 120.552,9.335 127.359,16.142 137.055,16.142 139.976,13.221 177.651,13.221 179.776,15.346 234.602,15.346 235.381,14.567 238.456,14.567 239.599,15.71 258.61,15.71 259.207,15.113 261.62,15.113 263.265,16.758 D61.2
NetD13_2: D13.2 D27.2 D41.2 U1.12 | length 274.2
  Top Layer w0.4: D13.2 251.067,76.339 260.592,66.814 D27.2 263.894,57.531 272.923,57.531 277.229,53.225 D41.2
  Bottom Layer w0.4: U1.12 110.806,7.685 114.046,4.445 283.845,4.445 286.639,7.239 286.639,17.399 277.229,26.809 D41.2
NetD14_2: D14.2 D28.2 | length 278.5
  Top Layer w0.4: D14.2 279.642,76.339 284.341,71.64 D28.2
  Bottom Layer w0.2: 101.232,6.49 101.232,7.685
  Bottom Layer w0.4: 101.232,6.49 99.441,4.699 99.441,2.032 100.076,1.397 112.395,1.397 114.643,3.645 284.188,3.645 287.439,6.896 287.439,17.869 278.13,27.178 278.13,39.624 279.781,41.275 279.781,56.642 283.972,60.833 D28.2
NetD15_1: D15.1 TAB.MX1 | length 6
  Top Layer w0.4: D15.1 TAB.MX1
NetD16_1: D16.1 Q.MX1 | length 6
  Top Layer w0.4: D16.1 Q.MX1
NetD17_1: D17.1 W.MX1 | length 6
  Top Layer w0.4: D17.1 W.MX1
NetD18_1: D18.1 E.MX1 | length 6
  Top Layer w0.4: D18.1 E.MX1
NetD19_1: D19.1 R.MX1 | length 6
  Top Layer w0.4: D19.1 R.MX1
NetD20_1: D20.1 T.MX1 | length 6
  Top Layer w0.4: D20.1 T.MX1
NetD21_1: D21.1 Y.MX1 | length 6
  Top Layer w0.4: D21.1 Y.MX1
NetD22_1: D22.1 U.MX1 | length 6
  Top Layer w0.4: D22.1 U.MX1
NetD23_1: D23.1 I.MX1 | length 6
  Top Layer w0.4: D23.1 I.MX1
NetD24_1: D24.1 O.MX1 | length 6
  Top Layer w0.4: D24.1 O.MX1
NetD25_1: D25.1 P.MX1 | length 6
  Top Layer w0.4: D25.1 P.MX1
NetD26_1: D26.1 {.MX1 | length 6
  Top Layer w0.4: D26.1 {.MX1
NetD27_1: D27.1 }.MX1 | length 6
  Top Layer w0.4: D27.1 }.MX1
NetD31_1: D31.1 S.MX1 | length 6.2
  Top Layer w0.4: D31.1 S.MX1
NetD32_1: D32.1 D.MX1 | length 6.2
  Top Layer w0.4: D32.1 D.MX1
NetD33_1: D33.1 F.MX1 | length 6.2
  Top Layer w0.4: D33.1 F.MX1
NetD34_1: D34.1 G.MX1 | length 6.2
  Top Layer w0.4: D34.1 G.MX1
NetD35_1: D35.1 H.MX1 | length 6.2
  Top Layer w0.4: D35.1 H.MX1
NetD36_1: D36.1 J.MX1 | length 6.2
  Top Layer w0.4: D36.1 J.MX1
NetD37_1: D37.1 K.MX1 | length 6.2
  Top Layer w0.4: D37.1 K.MX1
NetD38_1: D38.1 L.MX1 | length 6.2
  Top Layer w0.4: D38.1 L.MX1
NetD41_1: D41.1 ENTER.MX1 | length 6.2
  Top Layer w0.4: D41.1 ENTER.MX1
NetD42_1: D42.1 LEFT_SHIFT.MX1 | length 6.1
  Top Layer w0.4: D42.1 LEFT_SHIFT.MX1
NetD43_1: D43.1 Z.MX1 | length 6.1
  Top Layer w0.4: D43.1 Z.MX1
NetD44_1: D44.1 X.MX1 | length 6.1
  Top Layer w0.4: D44.1 X.MX1
NetD46_1: D46.1 V.MX1 | length 6.1
  Top Layer w0.4: D46.1 V.MX1
NetD48_1: D48.1 N.MX1 | length 6.1
  Top Layer w0.4: D48.1 N.MX1
NetD49_1: D49.1 M.MX1 | length 6.1
  Top Layer w0.4: D49.1 M.MX1
NetD53_1: D53.1 RIGHT_SHIFT.MX1 | length 6
  Top Layer w0.4: D53.1 RIGHT_SHIFT.MX1
NetD54_1: D54.1 LEFT_CTRL.MX1 | length 6.2
  Top Layer w0.4: D54.1 LEFT_CTRL.MX1
NetD55_1: D55.1 LEFT_FN.MX1 | length 6.2
  Top Layer w0.4: D55.1 LEFT_FN.MX1
NetD56_1: D56.1 LEFT_ALT.MX1 | length 6.2
  Top Layer w0.4: D56.1 LEFT_ALT.MX1
NetD57_1: D57.1 SPACE.MX1 | length 5.9
  Top Layer w0.4: SPACE.MX1 D57.1
  Bottom Layer w0.4: SPACE.MX1 SPACE.MX1@137.15,11.059
NetD58_1: D58.1 RIGHT_ALT.MX1 | length 5.6
  Top Layer w0.4: RIGHT_ALT.MX1 212.284,9.846 D58.1
NetD59_1: D59.1 RIGHT_FN.MX1 | length 4.7
  Top Layer w0.4: RIGHT_FN.MX1 D59.1
NetD60_1: D60.1 WIN.MX1 | length 4.5
  Top Layer w0.2: D60.1@260.162,9.846 D60.1
  Top Layer w0.4: WIN.MX1 D60.1@260.162,9.846
NetD61_1: D61.1 RIGHT_CTRL.MX1 | length 4.8
  Top Layer w0.2: D61.1@284.165,9.846 D61.1
  Top Layer w0.4: RIGHT_CTRL.MX1 D61.1@284.165,9.846
NetJ1_A5: J1.A5 R1.2@255.675,88.646 | length 2.9
  Top Layer w0.1: R1.2@255.409,88.646 255.651,88.646 255.893,88.888 J1.A5
NetJ1_A6: J1.A6 J1.B6 U1.4 | length 290.1
  Top Layer w0.1: J1.B6 255.393,91.778 J1.A6 255.393,89.789 255.393,89.666 254.822,89.094 254.822,89.087
  Top Layer w0.4: v1(115.062,15.456) 118.541,15.456 123.698,10.299 v1(123.698,9.525) ; v1(133.731,5.842) 133.731,5.08 135.417,3.394 283.593,3.394 288.036,7.837 288.036,17.817 280.708,25.145 280.708,52.286 272.415,60.579 267.843,60.579 264.414,64.008 264.414,65.659 254.635,75.438 254.635,87.896 254.759,88.02 254.759,89.024 254.822,89.087
  Bottom Layer w0.2: U1.4 111.201,14.935 111.887,15.621 114.707,15.621 114.872,15.456 v1(115.062,15.456)
  Bottom Layer w0.4: v1(123.698,9.525) 125.222,9.525 125.236,9.539 131.062,9.539 131.622,8.979 133.261,8.979 133.731,8.509 v1(133.731,5.842)
NetJ1_A7: J1.A7 J1.B7 U1.3 | length 298.4
  Top Layer w0.1: v1(254,89.408) 254.127,89.408 254.893,90.174 J1.A7
  Top Layer w0.2: v1(255.143,93.98) 255.143,92.828 J1.B7
  Top Layer w0.4: v1(115.062,16.256) 118.872,16.256 v1(124.789,10.339) ; v3(135.7,6.032) 137.414,4.318 283.21,4.318 286.766,7.874 286.766,17.78 279.908,24.638 279.908,51.689 272.034,59.563 267.716,59.563 263.525,63.754 263.525,65.024 253.492,75.057 253.492,87.884 253.959,88.351 253.959,89.367 v1(254,89.408)
  Bottom Layer w0.2: U1.3 110.858,15.735 111.379,16.256 v1(115.062,16.256)
  Bottom Layer w0.3: v1(254,89.408) 254.254,89.662 256.54,89.662 256.921,90.043 257.302,90.043 258.076,90.817 258.076,90.862 258.515,91.301 258.56,91.301 258.572,91.313 258.572,93.472 258.064,93.98 v1(255.143,93.98)
  Bottom Layer w0.4: v1(124.789,10.339) 131.393,10.339 131.953,9.779 133.858,9.779 135.7,7.937 v3(135.7,6.032)
NetJ1_B5: J1.B5 R2.1 | length 2
  Top Layer w0.1: J1.B5 v1(254.343,93.815)
  Bottom Layer w0.1: R2.1 R2.1@253.531,94.627
  Bottom Layer w0.3: R2.1@253.531,94.627 v1(254.343,93.815)
NetLEFT_ALT_MX2: LEFT_ALT.MX2 LEFT_CTRL.MX2 LEFT_FN.MX2 RIGHT_ALT.MX2 RIGHT_CTRL.MX2 RIGHT_FN.MX2 SPACE.MX2 U1.21 WIN.MX2 | length 265.9
  Top Layer w0.4: v2(83.118,7.306) 87.944,7.306 89.916,5.334 v1(98.933,5.334) 126.111,5.334 128.083,7.306 SPACE.MX2 RIGHT_ALT.MX2
  Bottom Layer w0.3: v1(98.933,5.334) 100.432,6.833 U1.21
  Bottom Layer w0.4: LEFT_CTRL.MX2 LEFT_FN.MX2 LEFT_ALT.MX2 v2(83.118,7.306) ; RIGHT_ALT.MX2 RIGHT_FN.MX2 WIN.MX2 RIGHT_CTRL.MX2
NetR1_1: R1.1@33.274,48.502 S1.1 U1.13 | length 107.2
  Top Layer w0.4: v2(36.576,47.371) 36.576,35.56 46.482,25.654 v2(46.482,19.558) ; v2(81.28,11.176) 82.423,11.176 85.493,8.106 88.275,8.106 89.396,6.985 97.536,6.985 100.33,9.779 v1(107.061,9.779)
  Bottom Layer w0.4: S1.1 33.401,48.629 33.274,48.502 34.405,47.371 v2(36.576,47.371) ; v2@46.355,19.431 49.403,16.383 75.184,16.383 80.391,11.176 v2(81.28,11.176) ; U1.13 106.832,8.788 107.061,9.017 v1(107.061,9.779)
NetU1_20: U1.20
pads on no net: 0.1 1.1 2.1 3.1 4.1 5.1 6.1 7.1 8.1 9.1 "\".1" +.1 -.1 :.1 <.1 >.1 ?.1 \.1 A.1 B.1 Backspace.1 C.1 CAPSLOCK.1 D.1 E.1 ENTER.1 ESC.1 F.1 G.1 H.1 I.1 J1. J1.A2 J1.A3 J1.A8 J1.A10 J1.A11 J1.B2 J1.B3 J1.B8 J1.B10 J1.B11 J1.S1 J1.S2 J1.S3 J1.S4 J.1 K.1 L.1 LEFT_ALT.1 LEFT_CTRL.1 LEFT_FN.1 LEFT_SHIFT.1 M.1 N.1 O.1 P.1 Q.1 R.1 RIGHT_ALT.1 RIGHT_CTRL.1 RIGHT_FN.1 RIGHT_SHIFT.1 S.1 SPACE.1 T.1 TAB.1 U1.1 U1.18 U1.19 U1.22 U1.39 U1.40 U1.42 U.1 V.1 W.1 WIN.1 X.1 Y.1 Z.1 {.1 }.1

## Polygon pours and split planes (outlines as drawn)
GND on Bottom Layer "GND" (solid, pour order 6): 0,101.219 0.127,101.092 290.322,101.092 290.322,0 0,0
GND on Bottom Layer "GND" (solid, shelved, pour order 4): 293.243,102.235 291.846,103.632 0,103.632 0,0 293.878,0

## Silkscreen, mask and mechanical layers (free items; w line width, h text height)
Mechanical 2:
  drawing of 288 lines, arcs and shapes, not listed

## Text inside footprints (layer, text, board x,y; h text height)
J1: Mechanical 1 "PCB Thickness 1.0mm" at 258.293,103.463 h0.76 r180